# Altium PCB SPDIF_I2S_SPDIF_JumperConnector_04-08-24.PcbDoc
Units mil, origin at the board's own origin, x right, y up, seen from the top; angles counter-clockwise.
Board outline 820 x 740 mil, 2 copper layers (Top Layer, Bottom Layer); 2 components, 12 nets, 48 pads, 0 vias.
Unrouted connection lines stored in the file: 3.
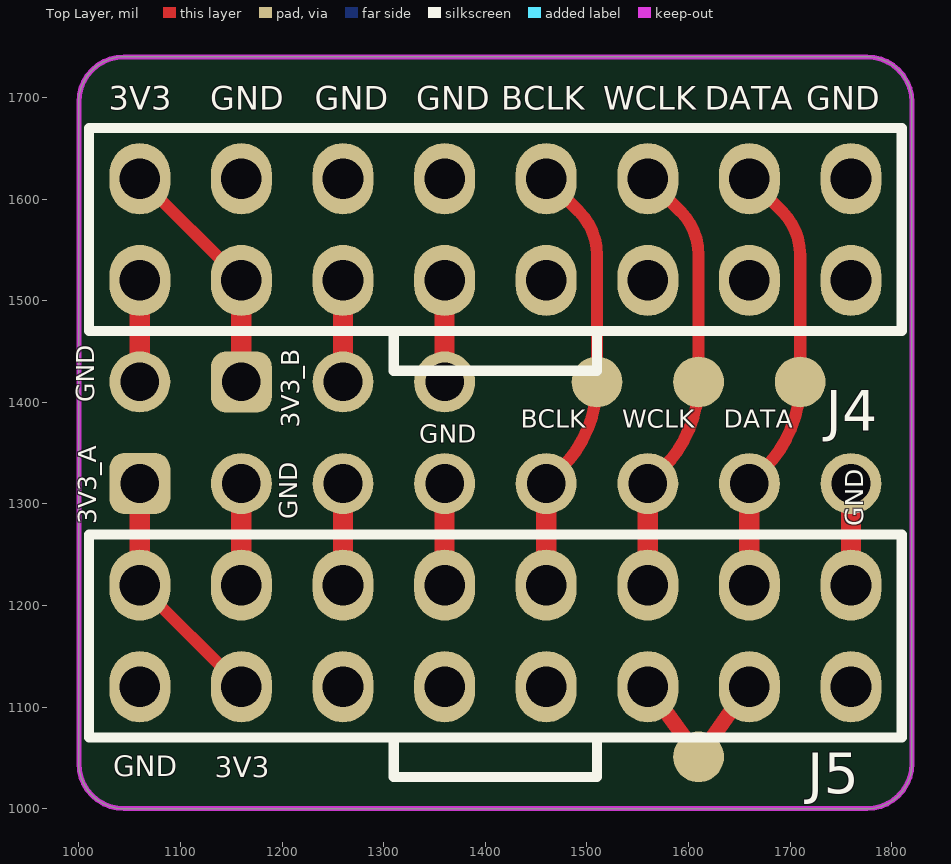
[diagram p0: Top Layer view]
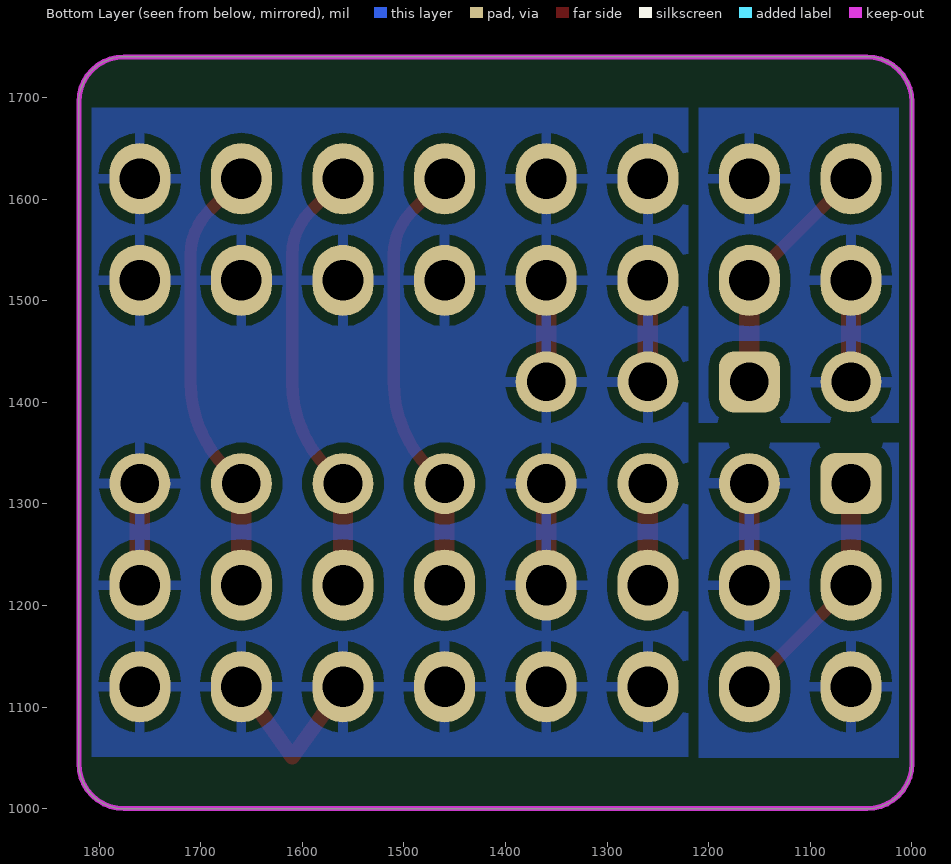
[diagram p1: Bottom Layer view, seen from below]

## Layer stack, top to bottom
Top Solder: solder mask 0.4, Solder Resist, Dk 3.5
Top Layer: signal copper 1.4
Dielectric 1: dielectric 12.6, FR-4, Dk 4.8
Bottom Layer: signal copper 1.4
Bottom Solder: solder mask 0.4, Solder Resist, Dk 3.5

## Board outline
1044.44,1000 cw(c1044.44,1044.44) 1000,1044.44 1000,1695.56 cw(c1044.44,1695.56) 1044.44,1740 1775.56,1740 cw(c1775.56,1695.56) 1820,1695.56 1820,1044.44 cw(c1775.56,1044.44) 1775.56,1000

## Design rules (kind name [scope] priority, off if disabled: settings)
Clearance [All] p1: gap=10 ignorepadtopadclearanceinfootprint=FALSE except(0: Arc-Hole Track-Hole SMDPad-Hole THPad-Hole Via-Hole Fill-Hole Poly-Hole Region-Hole Text-Hole)
PolygonConnect [All] p1: connectstyle=Relief reliefconductorwidth=10 reliefentries=4 polygonreliefangle="90 Angle" airgapwidth=10
RoutingVias [All] p1: holewidth=28 width=50 viastyle="Through Hole" minholewidth=28 minwidth=50 maxholewidth=28 maxwidth=50
SolderMaskExpansion [All] p1: expansion=4 istentingtop=FALSE
Width [All] p1 off: maxlimit=10 minlimit=10 preferedwidth=10
30 further rules are at their usual default settings.

## Components (designator, comment, footprint, x,y, rotation, side; value= is the part's Value field where it differs from the comment)
J4 "10-89-7160" "2x8 header 2.54mm pitch" 1410,1570 r180 top
J5 "10-89-7160" "2x8 header 2.54mm pitch" 1410,1170 r180 top

## Footprints (in the part's own frame and the unit in brackets; to place one, negate y for a bottom-side part, rotate by r counter-clockwise, add the part's x,y. Pads: shape width x height; smd on the part's side, far side on the other; paste and mask are expansions set on the pad)
"2x8 header 2.54mm pitch" [mil]
  oval 60x70 hole 40: 1(350,50) 2(350,-50) 3(250,50) 4(250,-50) 5(150,50) 6(150,-50) 7(50,50) 8(50,-50) 9(-50,50) 10(-50,-50) 11(-150,50) 12(-150,-50) 13(-250,50) 14(-250,-50) 15(-350,50) 16(-350,-50)
  silkscreen extent -400,-100 400,139

## Free pads (board coordinates)
  rrect50% 60x60 hole 38: 5(1060,1320) 5(1160,1420)
  round 60 hole 38: 5(1060,1420) 5(1160,1320) 5(1260,1320) 5(1260,1420) 5(1360,1320) 5(1360,1420) 5(1460,1320) 5(1560,1320) 5(1660,1320) 5(1760,1320)
  round 50 smd: 6(1510,1420) 6(1610,1051) 6(1610,1420) 6(1710,1420)

## Nets (pads, with @x,y where several pads share a name; then routed paths per layer and width w, separated by ;. In a path a pad name is that pad's centre, name@x,y a point inside that pad or via, vN(x,y) a via of type N, cw(c..) or ccw(c..) an arc to the next point about the centre after c; other vN are vias at no path point)
3.3V: J4.2 J4.3 J5.2 J5.3 pad.5@1060,1320 pad.5@1160,1420 | length 482.8
  Top Layer w12: J5.2 J5.3 ; J4.2 J4.3
  Top Layer w20: J5.2 pad.5@1060,1320 ; pad.5@1160,1420 J4.3
BCLK: J4.10 J5.10 pad.5@1460,1320 pad.6@1510,1420 | length 433.6
  Top Layer w12: pad.5@1460,1320 1474.64,1334.64 ccw(c1389.29,1420) 1510,1420 1510,1545 ccw(c1449.64,1545) 1492.32,1587.68 J4.10
  Top Layer w20: J5.10 pad.5@1460,1320
CS_RCVR_BCLK: 
CS_RCVR_Data: 
CS_RCVR_WCLK: 
DATA: J4.14 J5.14 pad.5@1660,1320 pad.6@1710,1420 | length 454.3
  Top Layer w10: J5.14 J5.14@1674.64,1234.64
  Top Layer w12: pad.5@1660,1320 1674.64,1334.64 ccw(c1589.29,1420) 1710,1420 1710,1545 ccw(c1649.64,1545) 1692.32,1587.68 J4.14
  Top Layer w20: J5.14 pad.5@1660,1320
GND: J4.1 J4.4 J4.5 J4.6 J4.7 J4.8 J4.9 J4.11 J4.13 J4.15 J4.16 J5.1 J5.4 J5.5 J5.7 J5.8 J5.9 J5.11 J5.13 J5.15 J5.16 pad.5@1060,1420 pad.5@1160,1320 pad.5@1260,1420 pad.5@1360,1320 pad.5@1360,1420 pad.5@1760,1320 pad.6@1610,1051 | length 773.4
  Top Layer w15: J5.11 1610,1051 J5.13@1661,1123
  Top Layer w20: pad.5@1060,1420 J4.1 ; J5.4 pad.5@1160,1320 ; pad.5@1260,1420 J4.5 ; J5.8 pad.5@1360,1320 ; pad.5@1360,1420 J4.7 ; J5.16 pad.5@1760,1320
I2S_XMTR_BCLK: 
I2S_XMTR_DATA: 
I2S_XMTR_LRCK: 
MCLK: J5.6 pad.5@1260,1320 | length 100
  Top Layer w20: J5.6 pad.5@1260,1320
WCLK: J4.12 J5.12 pad.5@1560,1320 pad.6@1610,1420 | length 433.6
  Top Layer w12: pad.5@1560,1320 1574.64,1334.64 ccw(c1489.29,1420) 1610,1420 1610,1545 ccw(c1549.64,1545) 1592.32,1587.68 J4.12
  Top Layer w20: J5.12 pad.5@1560,1320

## Polygon pours and split planes (outlines as drawn)
GND on Bottom Layer "Top 3v3 gnd" (solid, remove dead copper, pour order 0): 1010,1050 1010,1360 1210,1360 1210,1050
GND on Bottom Layer "Top 3v3 gnd" (solid, remove dead copper, pour order 1): 1000,1690 1000,1380 1210,1380 1210,1690
GND on Bottom Layer "bot com gnd" (solid, remove dead copper, pour order 2): 1220,1051 1220,1690 1815,1690 1815,1051 1224,1051

## Keep-outs
Keep-Out Layer:
  the board outline again, w5

## Silkscreen, mask and mechanical layers (free items; w line width, h text height)
Top Overlay:
  text "3V3" at 1029.25,1688 h23
  text "GND" at 1129.25,1688 h23
  text "GND" at 1232,1688 h23
  text "GND" at 1332,1688 h23
  text "BCLK" at 1416,1688 h23
  text "WCLK" at 1516,1688 h23
  text "DATA" at 1616,1688 h23
  text "GND" at 1716,1688 h23
  text "GND" at 1015,1400 h18 r90
  text "3V3_B" at 1217,1375 h18 r90
  text "BCLK" at 1435,1375 h18
  text "WCLK" at 1535,1375 h18
  text "DATA" at 1635,1375 h18
  text "GND" at 1335,1360 h18
  text "GND" at 1215,1285 h18 r90
  text "3V3_A" at 1017,1280 h18 r90
  text "GND" at 1772,1278 h18 r90
  text "GND" at 1034,1032 h20
  text "3V3" at 1134,1031 h20